# Altium PCB USBc to Ethernet(2.0).PcbDoc (part 1 of 3)
Units mil, origin at the board's own origin, x right, y up, seen from the top; angles counter-clockwise.
Board outline 2450 x 1100 mil, 4 copper layers (L1, L2, L3, L4), stack 61.58 mil thick; 85 components, 67 nets, 300 pads, 234 vias.
Unrouted connection lines stored in the file: 3.
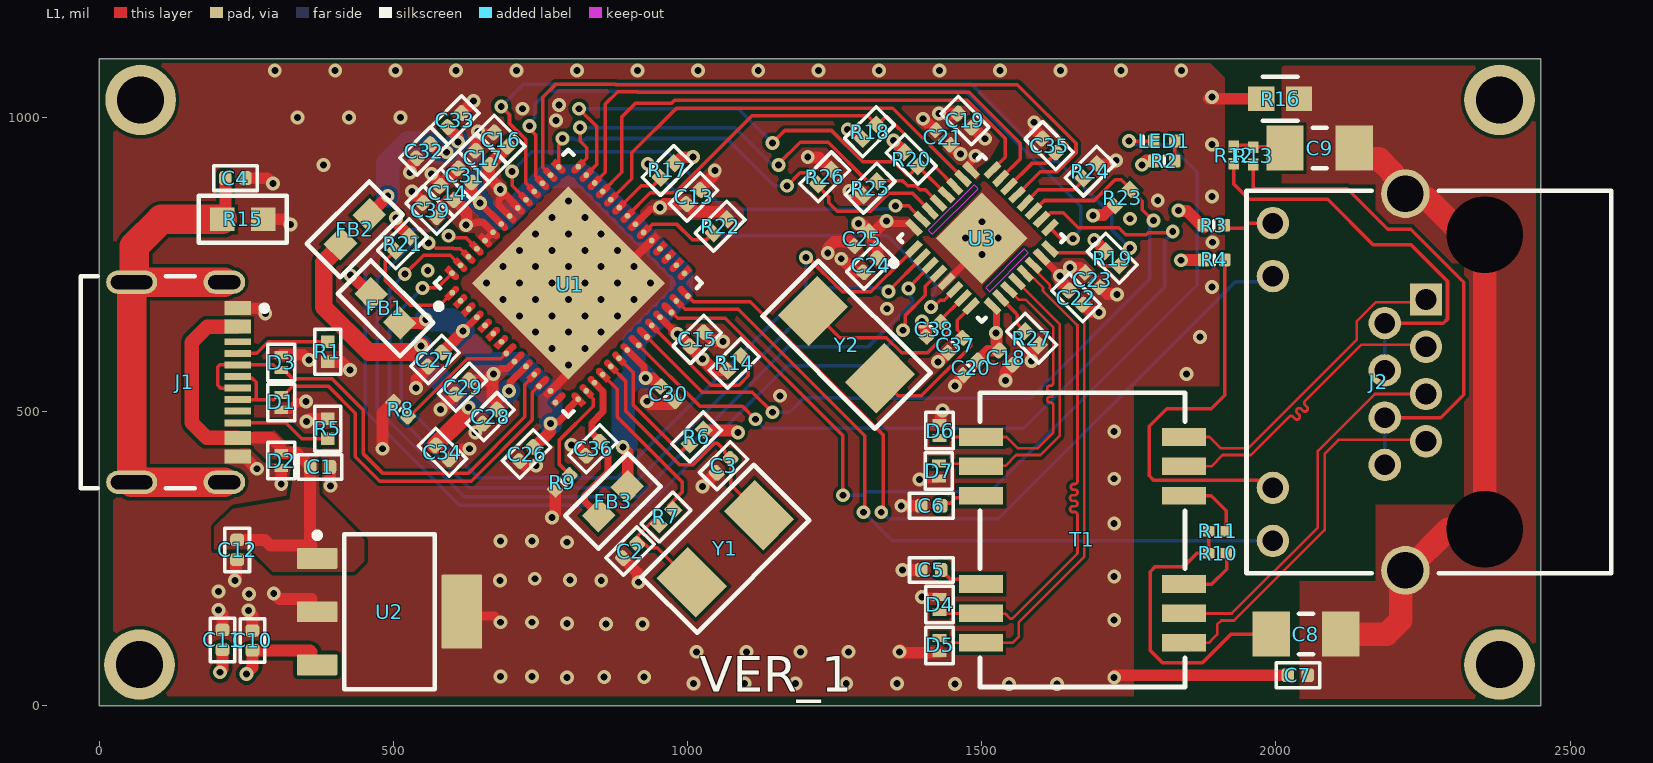
[diagram p0: L1 view]
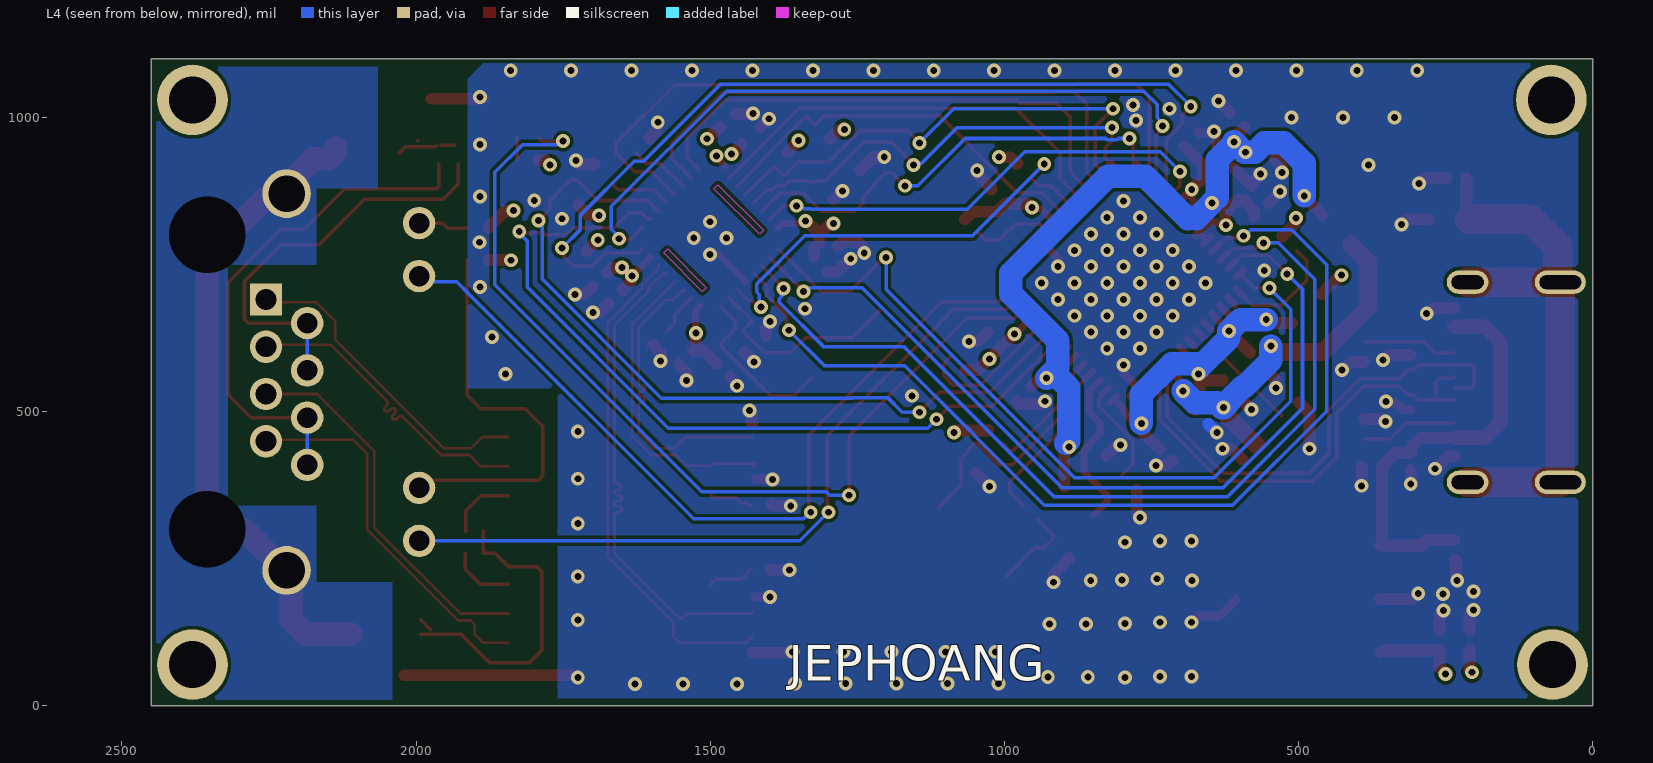
[diagram p1: L4 view, seen from below]
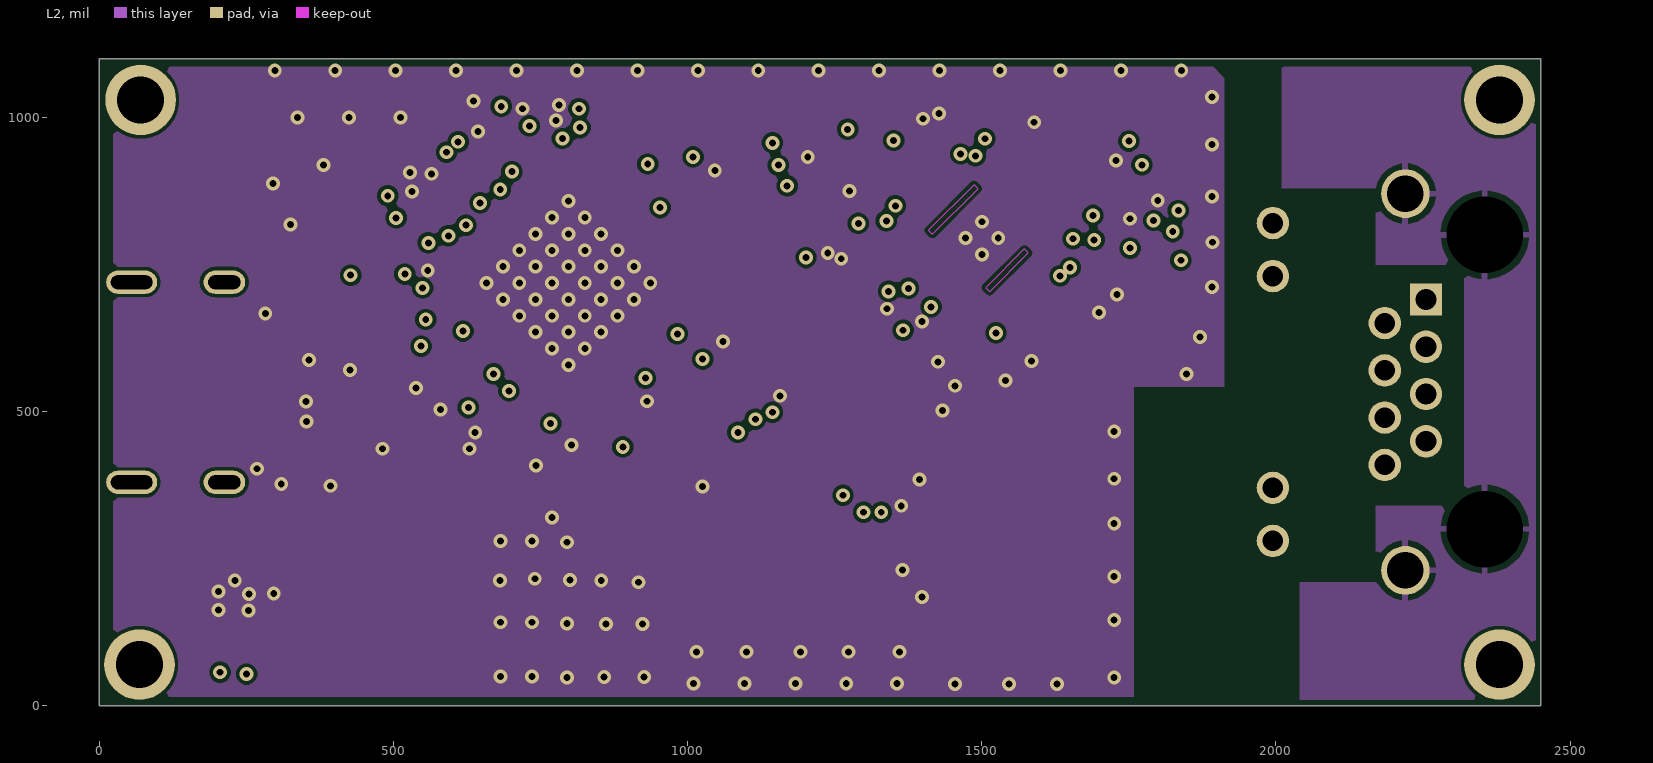
[diagram p2: L2]
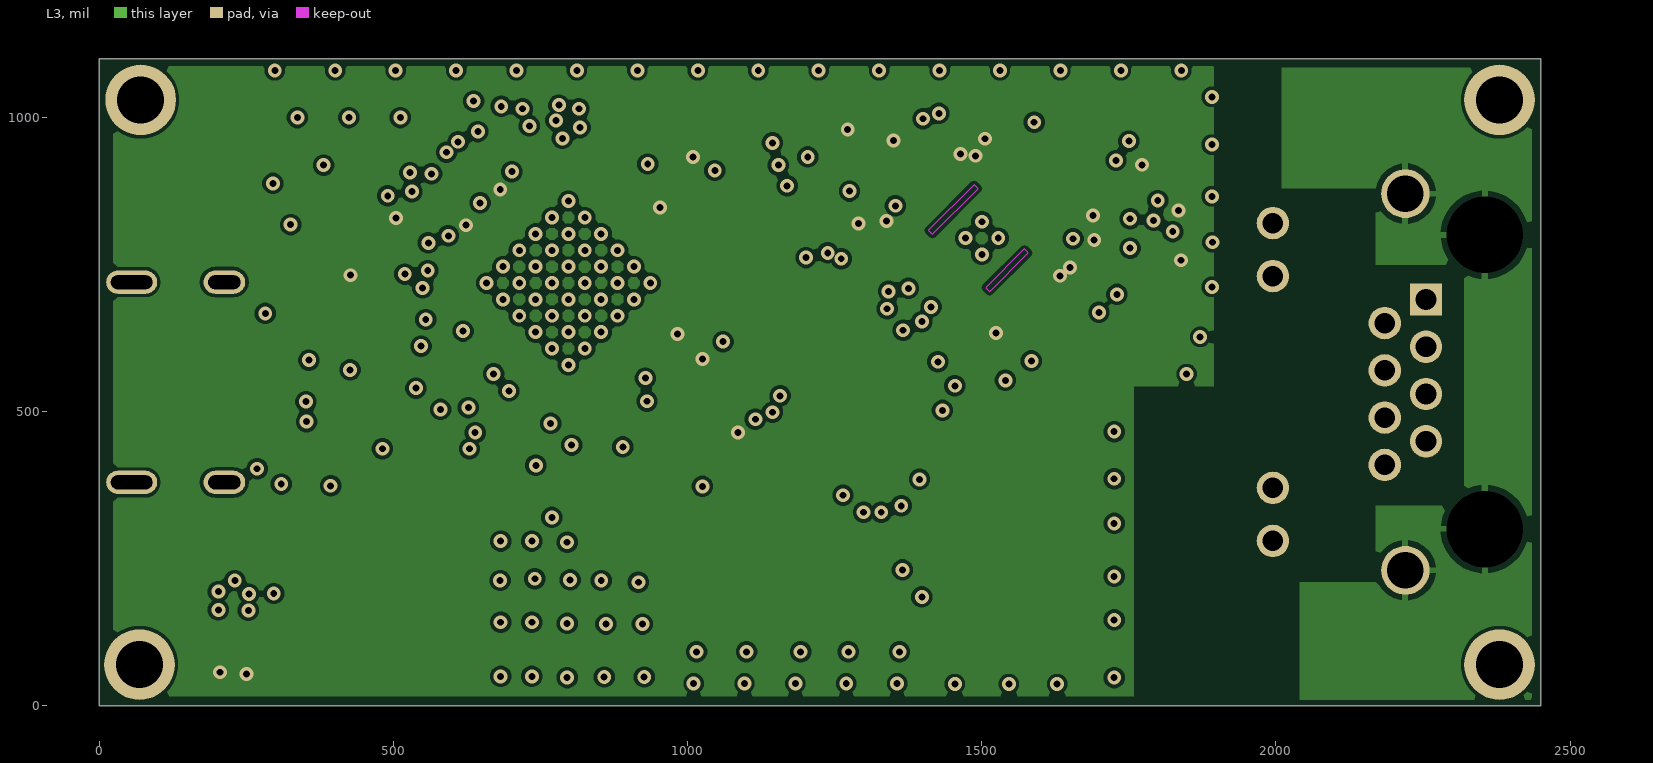
[diagram p3: L3]
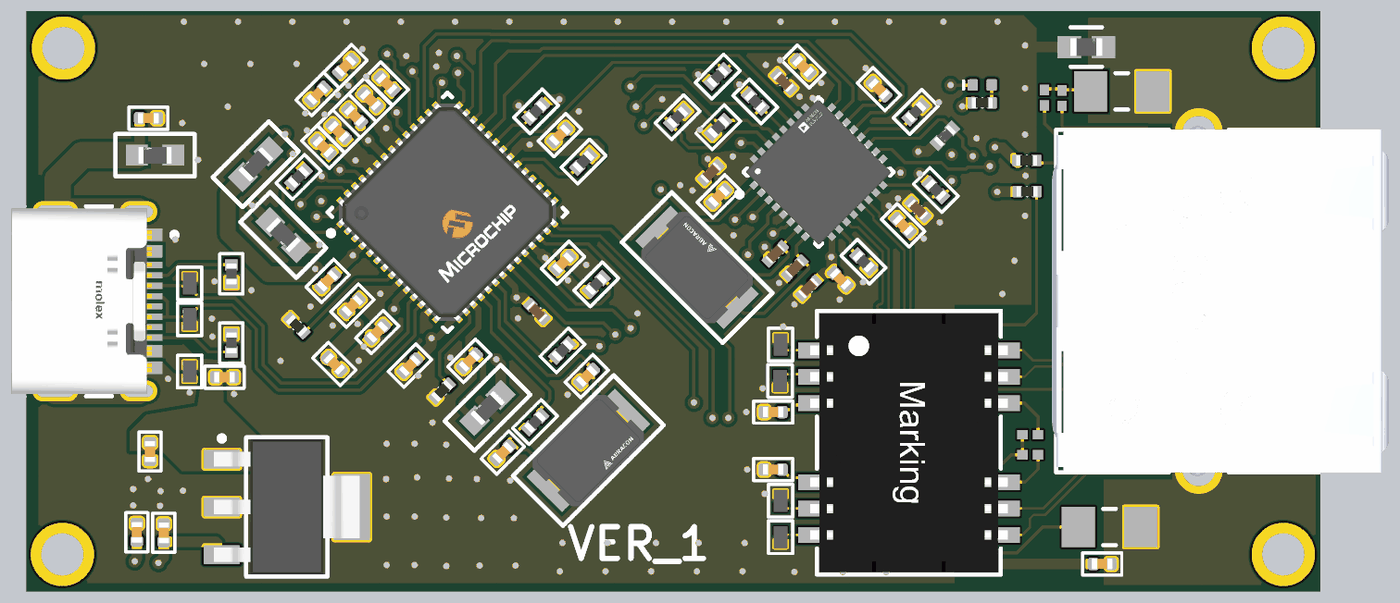
[diagram p5: 3D render of the assembled board from above, using the file's embedded part models]

## Layer stack, top to bottom
Top Solder: solder mask 0.4, Solder Resist, Dk 3.5
L1: signal copper 1.378
Dielectric 2: prepreg 3.913, PP-006, Dk 4.1
L2: signal copper 0.598
Dielectric5: dielectric 49.803, FR-4, Dk 4.8
L3: signal copper 0.598
Dielectric 3: prepreg 3.91, PP-006, Dk 4.1
L4: signal copper 1.38
Bottom Solder: solder mask 0.4, Solder Resist, Dk 3.5

## Board outline
0,0 2450,0 2450,1100 0,1100

## Design rules (kind name [scope] priority, off if disabled: settings)
Clearance Small [Keepout vs IsPad] p1: gap=0 ignorepadtopadclearanceinfootprint=FALSE
Clearance DIFF [InDifferentialPairClass('DIFF90') or InDifferentialPairClass('DIFF100')] p2: gap=6 ignorepadtopadclearanceinfootprint=FALSE
Clearance Clearance_1 [All] p3: gap=6 ignorepadtopadclearanceinfootprint=FALSE except(4: SMDPad-SMDPad)
DiffPairsRouting DIFF100 [InDifferentialPairClass('DIFF100')] p1: maxlimit=7 minlimit=7 mostfreqgap=7 toplayer_minwidth=4.5 toplayer_maxwidth=4.5 toplayer_prefwidth=4.5 midlayer1_minwidth=4.5 midlayer1_maxwidth=4.5 midlayer1_prefwidth=4.5 midlayer2_minwidth=4.5 midlayer2_maxwidth=4.5 midlayer2_prefwidth=4.5 bottomlayer_minwidth=4.5 bottomlayer_maxwidth=4.5 bottomlayer_prefwidth=4.5 maxuncoupledlength=500
DiffPairsRouting DIFF90_2 [InDifferentialPairClass('DIFF90')] p2: maxlimit=8 minlimit=7 mostfreqgap=8 toplayer_prefgap=7 toplayer_minwidth=6 toplayer_maxwidth=6 toplayer_prefwidth=6 midlayer1_prefgap=7 midlayer1_minwidth=6 midlayer1_maxwidth=6 midlayer1_prefwidth=6 midlayer2_prefgap=7 midlayer2_minwidth=6 midlayer2_maxwidth=6 midlayer2_prefwidth=6 bottomlayer_minwidth=6 bottomlayer_maxwidth=6 bottomlayer_prefwidth=6 maxuncoupledlength=500
HoleSize [All] p1: absolutevalues=TRUE maxlimit=1000 minlimit=1 maxpercent=80.000 minpercent=20.000
MatchedLengths MDI [InDifferentialPair('MDI_0') or InDifferentialPair('MDI_1')] p1: tolerance=10 checknetsindiffpair=TRUE checkdiffpairvsdiffpair=FALSE checkxsignals=FALSE checkothers=FALSE
MatchedLengths TD_RD [InDifferentialPair('RD') or InDifferentialPair('TD')] p2: tolerance=5 checknetsindiffpair=TRUE checkdiffpairvsdiffpair=FALSE checkxsignals=FALSE checkothers=FALSE
MinimumSolderMaskSliver [All] p1: minsoldermaskwidth=1.5
PlaneConnect [All] p1: pad.planeconnectstyle=Relief pad.reliefexpansion=20 pad.reliefentries=4 pad.reliefconductorwidth=10 pad.reliefairgap=10 via.planeconnectstyle=Direct via.reliefexpansion=20 via.reliefentries=4 via.reliefconductorwidth=10 via.reliefairgap=10
PolygonConnect [OnTop or OnBottom] p1: connectstyle=Direct reliefconductorwidth=10 reliefentries=4 polygonreliefangle="90 Angle" airgapwidth=10
PolygonConnect PolygonConnect_1 [All] p2: thpad.connectstyle=Relief thpad.reliefconductorwidth=10 thpad.reliefentries=4 thpad.polygonreliefangle="90 Angle" thpad.airgapwidth=10 smdpad.connectstyle=Direct smdpad.reliefconductorwidth=10 smdpad.reliefentries=4 smdpad.polygonreliefangle="90 Angle" smdpad.airgapwidth=10 via.connectstyle=Direct via.reliefconductorwidth=10 via.reliefentries=4 via.polygonreliefangle="90 Angle" via.airgapwidth=10
RoutingVias [All] p1: holewidth=11.81 width=23.62 viastyle="Through Hole" minholewidth=11.81 minwidth=23.62 maxholewidth=11.81 maxwidth=23.62
ShortCircuit [WithinRoom('Small')] p1: allowed=TRUE
SilkToSolderMaskClearance [IsPad] p1: minsilkscreentomaskgap=4 clearancetoexposedcopper=TRUE
SolderMaskExpansion [All] p1: expansion=4 istentingtop=FALSE
SupplyNets "Schematic Supply Nets" [InNet('GND_USB')] p1: voltage=0.000
SupplyNets "Schematic Supply Nets_9" [InNet('+3.3V')] p2: voltage=0.000
SupplyNets "Schematic Supply Nets_7" [InNet('+3.3V VDD')] p3: voltage=0.000
SupplyNets "Schematic Supply Nets_6" [InNet('VDDCORE')] p4: voltage=0.000
SupplyNets "Schematic Supply Nets_5" [InNet('VDDPLL')] p5: voltage=0.000
SupplyNets "Schematic Supply Nets_4" [InNet('VDDUSBPLL')] p6: voltage=0.000
SupplyNets "Schematic Supply Nets_3" [InNet('+5V')] p7: voltage=0.000
SupplyNets "Schematic Supply Nets_2" [InNet('GND_CLASSIS')] p8: voltage=0.000
SupplyNets "Schematic Supply Nets_1" [InNet('GND')] p9: voltage=0.000
Width [All] p1: maxlimit=100 minlimit=6 preferedwidth=10 toplayer_prefwidth=6 midlayer1_minwidth=8 midlayer2_minwidth=8 bottomlayer_prefwidth=6 minimp=50.000000 maximp=50.000000 favimp=50.000000
24 further rules are at their usual default settings.

## Classes and differential pairs
component class "Room Definition1": U3
differential pair class DIFF100: MDI_0 MDI_1 RD TD
differential pair class DIFF90: USB
differential pair USB: +USB_P -USB_N
differential pair TD: +TD_P -TD_N
differential pair RD: +RD_P -RD_N
differential pair MDI_1: +MDI_1_P -MDI_1_N
differential pair MDI_0: +MDI_0_P -MDI_0_N

## Components (designator, comment, footprint, x,y, rotation, side; value= is the part's Value field where it differs from the comment)
C1 "100nF, 50V" CAP_0402 375,406 r180 top
C2 "15pF" CAP_0402 902.03,263.03 r45 top
C3 "15pF" CAP_0402 1061,408 r45 top
C4 "4700pF" CAP_0402 231,897 r180 top
C5 "100nF, 50V" CAP_0402 1414,231 r0 top
C6 "100nF, 50V" CAP_0402 1414,340 r0 top
C7 "4700pF" CAP_0402 2037.07,52 r180 top
C8 "1000pF 2KV" JD-202R18W102KV4E-2_M 2051,122 r180 top
C9 "1000pF 2KV" JD-202R18W102KV4E-2_M 2074,948 r180 top
C10 "10uF, 10V" CAP_0402 260,111.07 r270 top
C11 "10uF, 10V" CAP_0402 209,112 r270 top
C12 "4.7uF, 16V" CAP_0402 234,265.07 r90 top
C13 "100nF, 50V" CAP_0402 1010,865 r225 top
C14 "100nF, 50V" CAP_0402 591.19,871.81 r315 top
C15 "100nF, 50V" CAP_0402 1016,623 r225 top
C16 "4700pF" CAP_0402 682.32,962.68 r315 top
C17 "1500pF" CAP_0402 651.32,931.68 r315 top
C18 "100nF, 50V" CAP_0402 1541,592 r135 top
C19 "100nF, 50V" CAP_0402 1471,995 r315 top
C20 "Capacitor 10nF +/-20% 50V 0402" CAPC0402(1005)60_L 1481,575 r45 top value=10nF
C21 "Capacitor 10nF +/-20% 50V 0402" CAPC0402(1005)60_L 1433.9,966.16 r315 top value=10nF
C22 "100nF, 50V" CAP_0402 1660,694 r135 top
C23 "Capacitor 10nF +/-20% 50V 0402" CAPC0402(1005)60_L 1688,724 r135 top value=10nF
C24 "100nF, 50V" CAP_0402 1311,749 r45 top
C25 "Capacitor 10nF +/-20% 50V 0402" CAPC0402(1005)60_L 1296,794 r45 top value=10nF
C26 "100nF, 50V" CAP_0402 726,428 r45 top
C27 "4700pF" CAP_0402 570.32,588.68 r45 top
C28 "1500pF" CAP_0402 664.32,491.68 r45 top
C29 "100nF, 50V" CAP_0402 617.16,541.68 r45 top
C30 "Capacitor 1µF +/-20% 10V 0402" CAPC0402(1005)60_L 966.63,530.21 r135 top value=1µF
C31 "100nF, 50V" CAP_0402 621.32,901.68 r315 top
C32 "4700pF" CAP_0402 551.19,942.87 r45 top
C33 "1500pF" CAP_0402 604.13,995.81 r225 top
C34 "4700pF" CAP_0402 583,431 r135 top
C35 "100nF, 50V" CAP_0402 1614.42,952.19 r315 top
C36 "4700pF" CAP_0402 839,437 r45 top
C37 "Capacitor 12pF +/-10% 50V 0402" CAPC0402(1005)33_L 1455,613 r225 top value=12pF
C38 "Capacitor 12pF +/-10% 50V 0402" CAPC0402(1005)33_L 1418,640 r225 top value=12pF
C39 "4700pF" CAP_0402 562.19,842.81 r315 top
D1 "" DIODE_0402 309,515.8 r90 top
D2 "AQ3045-01ETG" DIODE_0402 309,416.8 r90 top
D3 "" DIODE_0402 309,583.8 r270 top
D4 "" DIODE_0402 1428,172 r270 top
D5 "" DIODE_0402 1428,102.8 r90 top
D6 "AQ3045-01ETG" DIODE_0402 1428,467.8 r270 top
D7 "" DIODE_0402 1427,399 r90 top
FB1 "120" RES_0603 486.16,675.68 r315 top
FB2 "120" RES_0603 434,810 r225 top
FB3 "120" RES_0603 873,348 r225 top
J1 "USB-C" USBc_16PIN_QFN__footprint 100,550 r270 top
J2 "RJHSE-5381" AMPH-RJHSE-5381_V 2219.96,550.47 r90 top
LED1 "QBLP595-IB" QTB-QBLP595_V 1809.91,960 r0 top
R1 "5.1K" RES_0402 388,602.01 r270 top
R2 "Resistor 330R +/-5 % 0402 63 mW" RESC0402(1005)_L 1810.11,926.19 r180 top value=330
R3 "Resistor 330R +/-5 % 0402 63 mW" RESC0402(1005)_L 1894.28,817 r180 top value=330
R4 "Resistor 330R +/-5 % 0402 63 mW" RESC0402(1005)_L 1895,758 r180 top value=330
R5 "5.1K" RES_0402 388,471 r90 top
R6 "0R" RES_0402 1015,457 r225 top
R7 "500" RES_0402 963,321 r45 top
R8 "12KR2F" RESC0402(1005)_L 512,503.83 r135 top value=12k
R9 "12KR2F" RESC0402(1005)_L 787,380 r225 top value=12k
R10 "75" RESC1005X40X25LL05T10 1900.76,259 r0 top
R11 "75" RESC1005X40X25LL05T10 1900.76,297 r0 top
R12 "75" RESC1005X40X25LL05T10 1928,936 r270 top
R13 "75" RESC1005X40X25LL05T10 1961,935 r270 top
R14 "10K" RES_0402 1079,582 r225 top
R15 "10M" RES_0603 243.48,827 r180 top
R16 "10M" FP-CRCW0603-e3-IPC_A 2007,1032 r0 top
R17 "1K" RES_0402 965,910 r45 top value=1kR
R18 "10K" RES_0402 1309,976 r225 top
R19 "10K" RES_0402 1722,761 r135 top
R20 "10K" RES_0402 1380,929 r135 top
R21 "10K" RES_0402 515.13,785.65 r45 top
R22 "10K" RES_0402 1055,815 r45 top
R23 "1.5k" FP-RT0402-MFG 1739,864 r45 top value=1.5KΩ
R24 "10K" RES_0402 1684,909 r225 top
R25 "10K" RES_0402 1310,880 r45 top
R26 "10K" RES_0402 1233,899 r225 top
R27 "3.01K" RES_0402 1585,625 r315 top
T1 "749020100A" 749020100A 1671,282 r270 top
U1 "LAN9500AI-ABZJ-TR" FP-56QFN-5904-8x8B-MFG 797.16,718.68 r45 top
U2 "TL1963A-33DCYR" Regulator_4PIN 492.97,160 r0 top
U3 "ADIN1200CCP32Z" FP-CP-32-31-MFG 1500,795 r45 top
Y1 "25MHZ" Crystal_25MHZ 1064,267 r45 top
Y2 "25MHZ" Crystal_25MHZ 1270,614 r135 top

## Footprints (in the part's own frame and the unit in brackets; to place one, negate y for a bottom-side part, rotate by r counter-clockwise, add the part's x,y. Pads: shape width x height; smd on the part's side, far side on the other; paste and mask are expansions set on the pad)
749020100A [mm] "SMD LAN Transformers, body 12.4x8.6mm, 12-Leads"
  rect 0.76x1.9 smd: 1(-4.445,-4.385) 2(-3.175,-4.385) 3(-1.905,-4.385) 6(1.905,-4.385) 7(3.175,-4.385) 8(4.445,-4.385) 9(4.445,4.385) 10(3.175,4.385) 11(1.905,4.385) 14(-1.905,4.385) 15(-3.175,4.385) 16(-4.445,4.385)
  silkscreen extent -6.35,-4.43 6.35,4.43, body extent -6.22,-4.75 6.23,4.75, height 2.93
AMPH-RJHSE-5381_V [mm] "THD, 12-Leads, Body 16.51x15.75mm"
  rect 1.4x1.4 hole 0.89 mask+0.102: 1(3.56,-0.89)
  round 1.4 hole 0.89 mask+0.102: 2(2.54,0.89) 3(1.52,-0.89) 4(0.5,0.89) 5(-0.52,-0.89) 6(-1.54,0.89) 7(-2.56,-0.89) 8(-3.58,0.89) 9(-6.86,5.72) 10(-4.57,5.72) 11(4.57,5.72) 12(6.86,5.72)
  round 0 hole 3.3 unplated mask+0.102: MH1(-6.35,-3.43) MH2(6.35,-3.43)
  round 2.1 hole 1.57: S1(-8.13,0) S2(8.13,0)
  silkscreen extent -8.25,-8.89 8.25,6.86, body extent -8.42,-9.14 8.42,7.06, height 14.89
CAP_0402 [mm]
  rrect53% 0.54x0.6 smd: 1(-0.43,0) 2(0.43,0)
  silkscreen extent -0.94,-0.53 0.94,0.53, body extent -0.5,-0.25 0.5,0.25, height 0.55
CAPC0402(1005)33_L [mm] "Chip Capacitor, Body 1.0x0.5mm, Height 0.33mm, IPC High Density"
  rrect25% 0.5x0.55 smd: 1(-0.45,0) 2(0.45,0)
  silkscreen extent 0,-0.2 0,0.2, body extent -0.5,-0.25 0.5,0.25, height 0.55
CAPC0402(1005)60_L [mm] "Chip Capacitor, Body 1.0x0.5mm, Height 0.6mm, IPC High Density"
  rrect25% 0.5x0.55 smd: 1(-0.45,0) 2(0.45,0)
  silkscreen extent 0,-0.2 0,0.2, body extent -0.5,-0.25 0.5,0.25, height 0.6
Crystal_25MHZ [mm]
  rect 1.9x2.4 smd paste+0 mask+0: 1(-2.05,0) 2(2.05,0)
  silkscreen extent -3.43,-1.7 3.43,1.7, body extent -3.1,-1.8 3.1,1.8, height 0.25
DIODE_0402 [mm]
  rect 0.35x0.6 smd: 1(-0.325,0) 2(0.325,0)
  silkscreen extent -0.79,-0.58 0.79,0.58, body extent -0.54,-0.34 0.54,0.34, height 0.44
FP-56QFN-5904-8x8B-MFG [mm]
  round 0.252 smd paste-1000 mask+0: 1(-3.84,3.25) 2(-3.84,2.75) 3(-3.84,2.25) 4(-3.84,1.75) 5(-3.84,1.25) 6(-3.84,0.75) 7(-3.84,0.25) 8(-4.045,-0.25) 9(-4.045,-0.75) 10(-3.84,-1.25) 11(-3.84,-1.75) 12(-4.045,-2.25) 13(-3.84,-2.75) 14(-4.045,-3.25) 15(-3.25,-3.84) 16(-2.75,-3.84) 17(-2.25,-3.84) 18(-1.75,-3.84) 19(-1.25,-3.84) 20(-0.75,-3.84) 21(-0.25,-3.84) 22(0.25,-4.045) 23(0.75,-4.045) 24(1.25,-3.84) 25(1.75,-3.84) 26(2.25,-4.045) 27(2.75,-3.84) 28(3.25,-4.045) 29(3.84,-3.25) 30(3.84,-2.75) 31(3.84,-2.25) 32(3.84,-1.75) 33(3.84,-1.25) 34(3.84,-0.75) 35(3.84,-0.25) 36(3.854,0.25) 37(3.854,0.75) 38(3.84,1.25) 39(3.84,1.75) 40(3.854,2.25) 41(3.84,2.75) 42(3.854,3.25) 43(3.25,3.84) 44(2.75,3.84) 45(2.25,3.84) 46(1.75,3.84) 47(1.25,3.84) 48(0.75,3.84) 49(0.25,3.84) 50(-0.25,3.854) 51(-0.75,3.854) 52(-1.25,3.84) 53(-1.75,3.84) 54(-2.25,3.854) 55(-2.75,3.84) 56(-3.25,3.854)
  rect 5.9x5.9 smd paste-1000 mask+0: 57(0,0)
  L1 region: -4.185,-2.61 -3.635,-2.61 -3.581,-2.621 -3.536,-2.651 -3.506,-2.696 -3.495,-2.75 -3.495,-2.75 -3.506,-2.804 -3.536,-2.849 -3.581,-2.879 -3.635,-2.89 -3.635,-2.89 -4.185,-2.89
  L1 region: 4.185,-1.39 3.635,-1.39 3.581,-1.379 3.536,-1.349 3.506,-1.304 3.495,-1.25 3.495,-1.25 3.506,-1.196 3.536,-1.151 3.581,-1.121 3.635,-1.11 3.635,-1.11 4.185,-1.11
  L1 region: 0.89,4.185 0.89,3.635 0.879,3.581 0.849,3.536 0.804,3.506 0.75,3.495 0.75,3.495 0.696,3.506 0.651,3.536 0.621,3.581 0.61,3.635 0.61,3.635 0.61,4.185
  L1 region: 0.39,4.185 0.39,3.635 0.379,3.581 0.349,3.536 0.304,3.506 0.25,3.495 0.25,3.495 0.196,3.506 0.151,3.536 0.121,3.581 0.11,3.635 0.11,3.635 0.11,4.185
  L1 region: 1.61,-4.185 1.61,-3.635 1.621,-3.581 1.651,-3.536 1.696,-3.506 1.75,-3.495 1.75,-3.495 1.804,-3.506 1.849,-3.536 1.879,-3.581 1.89,-3.635 1.89,-3.635 1.89,-4.185
  L1 region: 4.185,-0.39 3.635,-0.39 3.581,-0.379 3.536,-0.349 3.506,-0.304 3.495,-0.25 3.495,-0.25 3.506,-0.196 3.536,-0.151 3.581,-0.121 3.635,-0.11 3.635,-0.11 4.185,-0.11
  L1 region: -0.61,4.185 -0.61,3.635 -0.621,3.581 -0.651,3.536 -0.696,3.506 -0.75,3.495 -0.75,3.495 -0.804,3.506 -0.849,3.536 -0.879,3.581 -0.89,3.635 -0.89,3.635 -0.89,4.185
  L1 region: -1.11,4.185 -1.11,3.635 -1.121,3.581 -1.151,3.536 -1.196,3.506 -1.25,3.495 -1.25,3.495 -1.304,3.506 -1.349,3.536 -1.379,3.581 -1.39,3.635 -1.39,3.635 -1.39,4.185
  L1 region: 0.61,-4.185 0.61,-3.635 0.621,-3.581 0.651,-3.536 0.696,-3.506 0.75,-3.495 0.75,-3.495 0.804,-3.506 0.849,-3.536 0.879,-3.581 0.89,-3.635 0.89,-3.635 0.89,-4.185
  L1 region: 2.89,4.185 2.89,3.635 2.879,3.581 2.849,3.536 2.804,3.506 2.75,3.495 2.75,3.495 2.696,3.506 2.651,3.536 2.621,3.581 2.61,3.635 2.61,3.635 2.61,4.185
  L1 region: 4.185,0.61 3.635,0.61 3.581,0.621 3.536,0.651 3.506,0.696 3.495,0.75 3.495,0.75 3.506,0.804 3.536,0.849 3.581,0.879 3.635,0.89 3.635,0.89 4.185,0.89
  L1 region: -2.11,4.185 -2.11,3.635 -2.121,3.581 -2.151,3.536 -2.196,3.506 -2.25,3.495 -2.25,3.495 -2.304,3.506 -2.349,3.536 -2.379,3.581 -2.39,3.635 -2.39,3.635 -2.39,4.185
  L1 region: -4.185,-0.11 -3.635,-0.11 -3.581,-0.121 -3.536,-0.151 -3.506,-0.196 -3.495,-0.25 -3.495,-0.25 -3.506,-0.304 -3.536,-0.349 -3.581,-0.379 -3.635,-0.39 -3.635,-0.39 -4.185,-0.39
  L1 region: 4.185,2.61 3.635,2.61 3.581,2.621 3.536,2.651 3.506,2.696 3.495,2.75 3.495,2.75 3.506,2.804 3.536,2.849 3.581,2.879 3.635,2.89 3.635,2.89 4.185,2.89
  L1 region: 1.39,4.185 1.39,3.635 1.379,3.581 1.349,3.536 1.304,3.506 1.25,3.495 1.25,3.495 1.196,3.506 1.151,3.536 1.121,3.581 1.11,3.635 1.11,3.635 1.11,4.185
  L1 region: 4.185,1.61 3.635,1.61 3.581,1.621 3.536,1.651 3.506,1.696 3.495,1.75 3.495,1.75 3.506,1.804 3.536,1.849 3.581,1.879 3.635,1.89 3.635,1.89 4.185,1.89
  L1 region: -4.185,3.39 -3.635,3.39 -3.581,3.379 -3.536,3.349 -3.506,3.304 -3.495,3.25 -3.495,3.25 -3.506,3.196 -3.536,3.151 -3.581,3.121 -3.635,3.11 -3.635,3.11 -4.185,3.11
  L1 region: -4.185,-1.11 -3.635,-1.11 -3.581,-1.121 -3.536,-1.151 -3.506,-1.196 -3.495,-1.25 -3.495,-1.25 -3.506,-1.304 -3.536,-1.349 -3.581,-1.379 -3.635,-1.39 -3.635,-1.39 -4.185,-1.39
  L1 region: 1.11,-4.185 1.11,-3.635 1.121,-3.581 1.151,-3.536 1.196,-3.506 1.25,-3.495 1.25,-3.495 1.304,-3.506 1.349,-3.536 1.379,-3.581 1.39,-3.635 1.39,-3.635 1.39,-4.185
  L1 region: 1.89,4.185 1.89,3.635 1.879,3.581 1.849,3.536 1.804,3.506 1.75,3.495 1.75,3.495 1.696,3.506 1.651,3.536 1.621,3.581 1.61,3.635 1.61,3.635 1.61,4.185
  L1 region: -4.185,-2.11 -3.635,-2.11 -3.581,-2.121 -3.536,-2.151 -3.506,-2.196 -3.495,-2.25 -3.495,-2.25 -3.506,-2.304 -3.536,-2.349 -3.581,-2.379 -3.635,-2.39 -3.635,-2.39 -4.185,-2.39
  L1 region: 4.185,-0.89 3.635,-0.89 3.581,-0.879 3.536,-0.849 3.506,-0.804 3.495,-0.75 3.495,-0.75 3.506,-0.696 3.536,-0.651 3.581,-0.621 3.635,-0.61 3.635,-0.61 4.185,-0.61
  L1 region: 3.11,-4.185 3.11,-3.635 3.121,-3.581 3.151,-3.536 3.196,-3.506 3.25,-3.495 3.25,-3.495 3.304,-3.506 3.349,-3.536 3.379,-3.581 3.39,-3.635 3.39,-3.635 3.39,-4.185
  L1 region: -1.61,4.185 -1.61,3.635 -1.621,3.581 -1.651,3.536 -1.696,3.506 -1.75,3.495 -1.75,3.495 -1.804,3.506 -1.849,3.536 -1.879,3.581 -1.89,3.635 -1.89,3.635 -1.89,4.185
  L1 region: 4.185,2.11 3.635,2.11 3.581,2.121 3.536,2.151 3.506,2.196 3.495,2.25 3.495,2.25 3.506,2.304 3.536,2.349 3.581,2.379 3.635,2.39 3.635,2.39 4.185,2.39
  L1 region: -2.89,-4.185 -2.89,-3.635 -2.879,-3.581 -2.849,-3.536 -2.804,-3.506 -2.75,-3.495 -2.75,-3.495 -2.696,-3.506 -2.651,-3.536 -2.621,-3.581 -2.61,-3.635 -2.61,-3.635 -2.61,-4.185
  L1 region: 2.39,4.185 2.39,3.635 2.379,3.581 2.349,3.536 2.304,3.506 2.25,3.495 2.25,3.495 2.196,3.506 2.151,3.536 2.121,3.581 2.11,3.635 2.11,3.635 2.11,4.185
  L1 region: 4.185,0.11 3.635,0.11 3.581,0.121 3.536,0.151 3.506,0.196 3.495,0.25 3.495,0.25 3.506,0.304 3.536,0.349 3.581,0.379 3.635,0.39 3.635,0.39 4.185,0.39
  L1 region: -3.11,4.185 -3.11,3.635 -3.121,3.581 -3.151,3.536 -3.196,3.506 -3.25,3.495 -3.25,3.495 -3.304,3.506 -3.349,3.536 -3.379,3.581 -3.39,3.635 -3.39,3.635 -3.39,4.185
  L1 region: -0.89,-4.185 -0.89,-3.635 -0.879,-3.581 -0.849,-3.536 -0.804,-3.506 -0.75,-3.495 -0.75,-3.495 -0.696,-3.506 -0.651,-3.536 -0.621,-3.581 -0.61,-3.635 -0.61,-3.635 -0.61,-4.185
  L1 region: -0.11,4.185 -0.11,3.635 -0.121,3.581 -0.151,3.536 -0.196,3.506 -0.25,3.495 -0.25,3.495 -0.304,3.506 -0.349,3.536 -0.379,3.581 -0.39,3.635 -0.39,3.635 -0.39,4.185
  L1 region: -0.39,-4.185 -0.39,-3.635 -0.379,-3.581 -0.349,-3.536 -0.304,-3.506 -0.25,-3.495 -0.25,-3.495 -0.196,-3.506 -0.151,-3.536 -0.121,-3.581 -0.11,-3.635 -0.11,-3.635 -0.11,-4.185
  L1 region: 3.39,4.185 3.39,3.635 3.379,3.581 3.349,3.536 3.304,3.506 3.25,3.495 3.25,3.495 3.196,3.506 3.151,3.536 3.121,3.581 3.11,3.635 3.11,3.635 3.11,4.185
  L1 region: 4.185,3.11 3.635,3.11 3.581,3.121 3.536,3.151 3.506,3.196 3.495,3.25 3.495,3.25 3.506,3.304 3.536,3.349 3.581,3.379 3.635,3.39 3.635,3.39 4.185,3.39
  L1 region: -1.39,-4.185 -1.39,-3.635 -1.379,-3.581 -1.349,-3.536 -1.304,-3.506 -1.25,-3.495 -1.25,-3.495 -1.196,-3.506 -1.151,-3.536 -1.121,-3.581 -1.11,-3.635 -1.11,-3.635 -1.11,-4.185
  L1 region: -2.61,4.185 -2.61,3.635 -2.621,3.581 -2.651,3.536 -2.696,3.506 -2.75,3.495 -2.75,3.495 -2.804,3.506 -2.849,3.536 -2.879,3.581 -2.89,3.635 -2.89,3.635 -2.89,4.185
  L1 region: 4.185,1.11 3.635,1.11 3.581,1.121 3.536,1.151 3.506,1.196 3.495,1.25 3.495,1.25 3.506,1.304 3.536,1.349 3.581,1.379 3.635,1.39 3.635,1.39 4.185,1.39
  L1 region: -3.39,-4.185 -3.39,-3.635 -3.379,-3.581 -3.349,-3.536 -3.304,-3.506 -3.25,-3.495 -3.25,-3.495 -3.196,-3.506 -3.151,-3.536 -3.121,-3.581 -3.11,-3.635 -3.11,-3.635 -3.11,-4.185
  L1 region: -4.185,-0.61 -3.635,-0.61 -3.581,-0.621 -3.536,-0.651 -3.506,-0.696 -3.495,-0.75 -3.495,-0.75 -3.506,-0.804 -3.536,-0.849 -3.581,-0.879 -3.635,-0.89 -3.635,-0.89 -4.185,-0.89
  L1 region: -4.185,1.89 -3.635,1.89 -3.581,1.879 -3.536,1.849 -3.506,1.804 -3.495,1.75 -3.495,1.75 -3.506,1.696 -3.536,1.651 -3.581,1.621 -3.635,1.61 -3.635,1.61 -4.185,1.61
  L1 region: -1.89,-4.185 -1.89,-3.635 -1.879,-3.581 -1.849,-3.536 -1.804,-3.506 -1.75,-3.495 -1.75,-3.495 -1.696,-3.506 -1.651,-3.536 -1.621,-3.581 -1.61,-3.635 -1.61,-3.635 -1.61,-4.185
  L1 region: 0.11,-4.185 0.11,-3.635 0.121,-3.581 0.151,-3.536 0.196,-3.506 0.25,-3.495 0.25,-3.495 0.304,-3.506 0.349,-3.536 0.379,-3.581 0.39,-3.635 0.39,-3.635 0.39,-4.185
  L1 region: 2.11,-4.185 2.11,-3.635 2.121,-3.581 2.151,-3.536 2.196,-3.506 2.25,-3.495 2.25,-3.495 2.304,-3.506 2.349,-3.536 2.379,-3.581 2.39,-3.635 2.39,-3.635 2.39,-4.185
  L1 region: -4.185,-1.61 -3.635,-1.61 -3.581,-1.621 -3.536,-1.651 -3.506,-1.696 -3.495,-1.75 -3.495,-1.75 -3.506,-1.804 -3.536,-1.849 -3.581,-1.879 -3.635,-1.89 -3.635,-1.89 -4.185,-1.89
  L1 region: -2.39,-4.185 -2.39,-3.635 -2.379,-3.581 -2.349,-3.536 -2.304,-3.506 -2.25,-3.495 -2.25,-3.495 -2.196,-3.506 -2.151,-3.536 -2.121,-3.581 -2.11,-3.635 -2.11,-3.635 -2.11,-4.185
  L1 region: 2.61,-4.185 2.61,-3.635 2.621,-3.581 2.651,-3.536 2.696,-3.506 2.75,-3.495 2.75,-3.495 2.804,-3.506 2.849,-3.536 2.879,-3.581 2.89,-3.635 2.89,-3.635 2.89,-4.185
  L1 region: -4.185,2.89 -3.635,2.89 -3.581,2.879 -3.536,2.849 -3.506,2.804 -3.495,2.75 -3.495,2.75 -3.506,2.696 -3.536,2.651 -3.581,2.621 -3.635,2.61 -3.635,2.61 -4.185,2.61
  L1 region: -4.185,2.39 -3.635,2.39 -3.581,2.379 -3.536,2.349 -3.506,2.304 -3.495,2.25 -3.495,2.25 -3.506,2.196 -3.536,2.151 -3.581,2.121 -3.635,2.11 -3.635,2.11 -4.185,2.11
  L1 region: -4.185,1.39 -3.635,1.39 -3.581,1.379 -3.536,1.349 -3.506,1.304 -3.495,1.25 -3.495,1.25 -3.506,1.196 -3.536,1.151 -3.581,1.121 -3.635,1.11 -3.635,1.11 -4.185,1.11
  L1 region: -4.185,0.89 -3.635,0.89 -3.581,0.879 -3.536,0.849 -3.506,0.804 -3.495,0.75 -3.495,0.75 -3.506,0.696 -3.536,0.651 -3.581,0.621 -3.635,0.61 -3.635,0.61 -4.185,0.61
  L1 region: -4.185,0.39 -3.635,0.39 -3.581,0.379 -3.536,0.349 -3.506,0.304 -3.495,0.25 -3.495,0.25 -3.506,0.196 -3.536,0.151 -3.581,0.121 -3.635,0.11 -3.635,0.11 -4.185,0.11
  L1 region: -4.185,-3.11 -3.635,-3.11 -3.581,-3.121 -3.536,-3.151 -3.506,-3.196 -3.495,-3.25 -3.495,-3.25 -3.506,-3.304 -3.536,-3.349 -3.581,-3.379 -3.635,-3.39 -3.635,-3.39 -4.185,-3.39
  L1 region: 4.185,-3.39 3.635,-3.39 3.581,-3.379 3.536,-3.349 3.506,-3.304 3.495,-3.25 3.495,-3.25 3.506,-3.196 3.536,-3.151 3.581,-3.121 3.635,-3.11 3.635,-3.11 4.185,-3.11
  L1 region: 4.185,-2.89 3.635,-2.89 3.581,-2.879 3.536,-2.849 3.506,-2.804 3.495,-2.75 3.495,-2.75 3.506,-2.696 3.536,-2.651 3.581,-2.621 3.635,-2.61 3.635,-2.61 4.185,-2.61
  L1 region: 4.185,-2.39 3.635,-2.39 3.581,-2.379 3.536,-2.349 3.506,-2.304 3.495,-2.25 3.495,-2.25 3.506,-2.196 3.536,-2.151 3.581,-2.121 3.635,-2.11 3.635,-2.11 4.185,-2.11
  L1 region: 4.185,-1.89 3.635,-1.89 3.581,-1.879 3.536,-1.849 3.506,-1.804 3.495,-1.75 3.495,-1.75 3.506,-1.696 3.536,-1.651 3.581,-1.621 3.635,-1.61 3.635,-1.61 4.185,-1.61
  silkscreen extent -4.8,-4.08 4.08,4.08, body extent -4.29,-4.29 4.29,4.29, height 0.25
FP-CP-32-31-MFG [mm]
  rect 0.805x0.3 smd paste+0 mask+0: 1(-2.403,1.75) 2(-2.403,1.25) 3(-2.403,0.75) 4(-2.402,0.25) 5(-2.402,-0.25) 6(-2.403,-0.75) 7(-2.403,-1.25) 8(-2.403,-1.75) 17(2.403,-1.75) 18(2.403,-1.25) 19(2.403,-0.75) 20(2.402,-0.25) 21(2.402,0.25) 22(2.403,0.75) 23(2.403,1.25) 24(2.403,1.75)
  rect 0.3x0.805 smd paste+0 mask+0: 9(-1.75,-2.403) 10(-1.25,-2.403) 11(-0.75,-2.403) 12(-0.25,-2.402) 13(0.25,-2.402) 14(0.75,-2.403) 15(1.25,-2.403) 16(1.75,-2.403) 25(1.75,2.403) 26(1.25,2.403) 27(0.75,2.403) 28(0.25,2.402) 29(-0.25,2.402) 30(-0.75,2.403) 31(-1.25,2.403) 32(-1.75,2.403)
  rect 2.8x2.8 smd paste+0 mask+0: 33(0,0)
  Keep-Out Layer region: -1.4,-1.875 0.97,-1.875 0.97,-1.625 -1.4,-1.625
  Keep-Out Layer region: -1.4,1.625 1.4,1.625 1.4,1.875 -1.4,1.875
  silkscreen extent -3.57,-2.55 2.55,2.55, body extent -2.91,-2.91 2.91,2.91, height 0.25
FP-CRCW0603-e3-IPC_A [mil]
  rect 44.69x41.82 smd paste+0 mask+0: 1(-32.1,0) 2(32.1,0)
  silkscreen extent -30,-37 30,37, body extent -74,-41 74,41, height 10
FP-RT0402-MFG [mm]
  rect 0.5x0.6 smd paste+0 mask+0: 1(-0.5,0) 2(0.5,0)
  body extent -0.85,-0.4 0.85,0.4, height 0.25
JD-202R18W102KV4E-2_M [mm] "Chip Capacitor, 2-Leads, Body 3.42x1.82mm, IPC Low Density"
  rect 1.6x1.95 smd: 1(-1.5,0) 2(1.5,0)
  silkscreen extent -0.3,-0.87 0.3,0.87, body extent -1.71,-0.91 1.71,0.91, height 1.7
QTB-QBLP595_V [mm] "SMD, 2-Leads, Body 1x0.5mm"
  rrect25% 0.5x0.55 smd: 1(-0.455,0) 2(0.455,0)
  silkscreen extent -0.9,-0.2 -0.9,0.2, body extent -0.5,-0.25 0.5,0.25, height 0.5
Regulator_4PIN [mm] "SOT223, 4-Leads, Body 6.7x3.7mm, Pitch 2.3mm, IPC Medium Density"
  rrect11% 1.75x0.9 smd: 1(-3.125,2.3) 2(-3.125,0) 3(-3.125,-2.3)
  rrect6% 1.75x3.2 smd: 4(3.125,0)
  silkscreen extent -3.25,-3.35 1.95,3.42, body extent -3.5,-3.25 3.5,3.25, height 1.62
RES_0402 [mm]
  rect 0.54x0.6 smd: 1(-0.432,0) 2(0.432,0)
  silkscreen extent -0.97,-0.56 0.97,0.56, body extent -0.5,-0.25 0.5,0.25, height 0.37
RES_0603 [mil]
  rect 41.68x39.85 smd paste+0 mask+0: 1(-34.52,0) 2(34.52,0)
  silkscreen extent -75,-40 75,40, body extent -75,-39 75,40, height 10
RESC0402(1005)_L [mm] "Chip Resistor, Body 1.0x0.5mm, IPC High Density"
  rrect25% 0.5x0.55 smd: 1(-0.45,0) 2(0.45,0)
  silkscreen extent 0,-0.2 0,0.2, body extent -0.5,-0.25 0.5,0.25, height 0.3
RESC1005X40X25LL05T10 [mm] "Chip Resistor, 2-Leads, Body 1.00x0.50mm, IPC High Density"
  rect 0.5x0.45 smd: 1(-0.375,0) 2(0.375,0)
  body extent -0.53,-0.27 0.53,0.28, height 0.4
USBc_16PIN_QFN__footprint [mm]
  rect 0.6x1.15 smd paste+0 mask+0: A1B12(-3.2,3.425) A4B9(-2.4,3.425) B1A12(3.2,3.425) B4A9(2.4,3.425)
  rect 0.3x1.15 smd paste+0 mask+0: A5(-1.25,3.425) A6(-0.25,3.425) A7(0.25,3.425) A8(1.25,3.425) B5(1.75,3.425) B6(0.75,3.425) B7(-0.75,3.425) B8(-1.75,3.425)
  rrect100% 1x1.8 hole 1.4 slot 0.6 at 0 deg paste-2539.97 mask+0: S1(-4.32,2.85) S2(4.32,2.85)
  rrect100% 1x2.2 hole 1.8 slot 0.6 at 0 deg paste-2539.97 mask+0: S3(-4.32,-1.15) S4(4.32,-1.15)
  silkscreen extent -4.57,-3.35 4.57,4.7, body extent -4.92,-3.45 4.92,4.1, height 0.25

## Part data
C1 C5 C6 C13 C14 C15 C26 C29 C31: library part CL05B104KB54PNC, "CAP CER 0.1UF 50V X7R 0402", Capacitor Type=Ceramic, LCSC Part Number=C307331, Manufacturer=Samsung, Supplier Part Number=1276-CL05B104KB54PNCCT-ND, Category="Ceramic Capacitors", ComponentLink1Description=https://datasheet.ciiva.com:443/pdfs/VipMasterIC/IC/SEMS/SEMS-S-A0006318249/SEMS-S-A0006320959-1.pdf?src-supplier=IHS+Markit, ComponentLink1URL=https://datasheet.ciiva.com:443/pdfs/VipMasterIC/IC/SEMS/SEMS-S-A0006318249/SEMS-S-A0006320959-1.pdf?src-supplier=IHS+Markit, ComponentLink2Description=https://datasheet.octopart.com/CL05B104KB54PNC-Samsung-datasheet-8326407.pdf?src-supplier=TME, ComponentLink2URL=https://datasheet.octopart.com/CL05B104KB54PNC-Samsung-datasheet-8326407.pdf?src-supplier=TME, Dielectric Material=Ceramic, Manufacturer Part Number=CL05B104KB54PNC, Pins=2, Pricing="1=0.1, 10=0.044, 50=0.025, 100=0.0194, 500=0.0146, 1000=0.01147, 2500=0.01043, 5000=0.00959 (USD)", Reach SVHC Compliant=Yes, RoHS=Yes, RoHS Compliant=Yes, Stock=1237875, Supplier=Digikey
C2 C3: library part CL05C150JC51PNC, "Multilayer Ceramic Capacitors MLCC - SMD/SMT 0402 C0G 15pF 5% 100V automotive grade", Case/Package=0402, Dielectric Material=Ceramic, Manufacturer="Samsung Electro-Mechanics", Max Operating Temperature=125°C, Min Operating Temperature=-55°C, Temperature Coefficient=30ppm/°C, Tolerance=5%, Voltage Rating=100V, Capacitance=15pF, Category="Ceramic Capacitors", China RoHS=Compliant, ComponentLink1Description=https://datasheet.octopart.com:443/CL05C150JC51PNC-Samsung-Electro-Mechanics-datasheet-176142735.pdf?src-supplier=IHS, ComponentLink1URL=https://datasheet.octopart.com:443/CL05C150JC51PNC-Samsung-Electro-Mechanics-datasheet-176142735.pdf?src-supplier=IHS, Height=500µm, Length=1mm, Lifecycle Status=Production, Manufacturer Part Number=CL05C150JC51PNC, Material=Ceramic, Mount="Surface Mount", Number of Terminals=2, Pricing 1="1=0.1, 10=0.055, 50=0.0378, 100=0.0326, 500=0.02386 (USD)", REACH SVHC=Unaffected, RoHS=Compliant, Stock 1=123361, Supplier 1=DigiKey, Voltage Rating (DC)=100V, Width=500µm
C4 C7 C16 C27 C32 C34 C36 C39: library part CL05B472KB5NNNC, "4700 pF ±10% 50V Ceramic Capacitor X7R 0402 (1005 Metric)", Capacitance=4.7nF, Case Code (Imperial)=0402, Case Code (Metric)=1005, Dielectric=X7R, Dielectric Material=Ceramic, Manufacturer="Samsung Electro-Mechanics", Max Operating Temperature=125°C, Min Operating Temperature=-55°C, Tolerance=10%, Voltage=50V, Case/Package=0402, Category="Ceramic Capacitors", China RoHS=Compliant, ComponentLink1Description=https://datasheet.octopart.com:443/CL05B472KB5NNNC-Samsung-Electro-Mechanics-datasheet-182018856.pdf?src-supplier=IHS, ComponentLink1URL=https://datasheet.octopart.com:443/CL05B472KB5NNNC-Samsung-Electro-Mechanics-datasheet-182018856.pdf?src-supplier=IHS, ComponentLink2Description=https://datasheet.octopart.com:443/CL05B472KB5NNNC-Samsung-Electro-Mechanics-datasheet-137699841.pdf?src-supplier=Samsung+SCT, ComponentLink2URL=https://datasheet.octopart.com:443/CL05B472KB5NNNC-Samsung-Electro-Mechanics-datasheet-137699841.pdf?src-supplier=Samsung+SCT, ComponentLink3Description=https://datasheet.octopart.com:443/CL05B472KB5NNNC-Samsung-Electro-Mechanics-datasheet-116890943.pdf?src-supplier=Future+Electronics, ComponentLink3URL=https://datasheet.octopart.com:443/CL05B472KB5NNNC-Samsung-Electro-Mechanics-datasheet-116890943.pdf?src-supplier=Future+Electronics, ComponentLink4Description=https://datasheet.octopart.com:443/CL05B472KB5NNNC-Samsung-Electro-Mechanics-datasheet-81461654.pdf?src-supplier=Future+Electronics, ComponentLink4URL=https://datasheet.octopart.com:443/CL05B472KB5NNNC-Samsung-Electro-Mechanics-datasheet-81461654.pdf?src-supplier=Future+Electronics, ComponentLink5Description=https://datasheet.octopart.com:443/CL05B472KB5NNNC-Samsung-datasheet-42485177.pdf?src-supplier=Future+Electronics, ComponentLink5URL=https://datasheet.octopart.com:443/CL05B472KB5NNNC-Samsung-datasheet-42485177.pdf?src-supplier=Future+Electronics, ComponentLink6Description=https://datasheet.octopart.com:443/CL05B472KB5NNNC-Samsung-datasheet-26589051.pdf?src-supplier=Future+Electronics, ComponentLink6URL=https://datasheet.octopart.com:443/CL05B472KB5NNNC-Samsung-datasheet-26589051.pdf?src-supplier=Future+Electronics, ComponentLink7Description=https://datasheet.octopart.com:443/CL05B472KB5NNNC-Samsung-datasheet-12537298.pdf?src-supplier=Future+Electronics, ComponentLink7URL=https://datasheet.octopart.com:443/CL05B472KB5NNNC-Samsung-datasheet-12537298.pdf?src-supplier=Future+Electronics, ComponentLink8Description=https://datasheet.octopart.com:443/CL05B472KB5NNNC-Samsung-Electro-Mechanics-datasheet-149154072.pdf?src-supplier=Future+Electronics, ComponentLink8URL=https://datasheet.octopart.com:443/CL05B472KB5NNNC-Samsung-Electro-Mechanics-datasheet-149154072.pdf?src-supplier=Future+Electronics, ComponentLink9Description=https://datasheet.octopart.com/CL05B472KB5NNNC-Samsung-Electro-Mechanics-datasheet-97040617.pdf, ComponentLink9URL=https://datasheet.octopart.com/CL05B472KB5NNNC-Samsung-Electro-Mechanics-datasheet-97040617.pdf, ComponentLink10Description=https://datasheet.octopart.com/CL05B472KB5NNNC-Samsung-Electro-Mechanics-datasheet-8324245.pdf, ComponentLink10URL=https://datasheet.octopart.com/CL05B472KB5NNNC-Samsung-Electro-Mechanics-datasheet-8324245.pdf, ComponentLink11Description=https://datasheet.octopart.com:443/CL05B472KB5NNNC-Samsung-Electro-Mechanics-datasheet-11772878.pdf?src-supplier=Arrow+Electronics, ComponentLink11URL=https://datasheet.octopart.com:443/CL05B472KB5NNNC-Samsung-Electro-Mechanics-datasheet-11772878.pdf?src-supplier=Arrow+Electronics, ComponentLink12Description=https://datasheet.octopart.com:443/CL05B472KB5NNNC-Samsung-datasheet-8326407.pdf?src-supplier=TME, ComponentLink12URL=https://datasheet.octopart.com:443/CL05B472KB5NNNC-Samsung-datasheet-8326407.pdf?src-supplier=TME, Country of Origin="Mainland China, Philippines, South Korea", Depth=500µm, Export Control Classification Number (ECCN) Code=EAR99, Harmonized Tariff Schedule (HTS) Code=8532.24.00.20, Height=550µm, Introduction Date=2010-02-10, Lead Free="Lead Free", Length=1mm, Lifecycle Status=Production, Manufacturer Part Number=CL05B472KB5NNNC, Material=Ceramic, Mount="Surface Mount", Number of Terminals=2, Pricing 1="1=0.1, 10=0.033, 50=0.0224, 100=0.019, 500=0.01354 (USD)", Radiation Hardening=No, REACH SVHC=Unaffected, RoHS=Compliant, Schedule B="8532240020, 8532240020|8532240020, 8532240020|8532240020|8532240020, 8532240020|8532240020|8532240020|8532240020", Stock 1=84266, Supplier 1=DigiKey, Thickness=558.8µm, Voltage Rating=50V, Voltage Rating (DC)=50V, Width=500µm
C8 C9: library part CMP-2000-05161-1, "Chip Capacitor, 1 nF, +/- 10%, 2000 V, -55 to 125 degC, 1206 (3216 Metric), RoHS, Tape and Reel", Capacitance=1000pF, Case Code - in=1206, Case Code - mm=3216, Case Height=1.27mm, Case Length=3.15mm, Case Width=1.6mm, Dielectric=X7R, Manufacturer="Johanson Dielectrics", Maximum Operating Temperature=+125C, Minimum Operating Temperature=-55C, Package / Case=1206(3216metric), Tolerance=10%, Voltage Rating DC=2kV, Brand=JohansonDielectrics, Class=2, Datasheet URL=http://www.farnell.com/datasheets/87135.pdf, Datasheet Version=Apr-07, Factory Pack Quantity=3000, Manufacturer URL=http://www.johansondielectrics.com, Packaging=Reel, Product=GeneralTypeMLCCs, Product Category=MultilayerCeramicCapacitorsMLCC-SMD/SMT, RoHS=Details, Termination Style=SMD/SMT, Type=HighVoltageCapacitors
C10 C11: library part CL05A106MP5NUNC, "CAP CER 10UF 10V X5R 0402", Capacitance=10µF, Case Code (Imperial)=0402, Case Code (Metric)=1005, Dielectric=X5R, Dielectric Material=Ceramic, Manufacturer="Samsung Electro-Mechanics", Max Operating Temperature=85°C, Min Operating Temperature=-55°C, Tolerance=20%, Voltage Rating=10V, Case/Package=0402, Category="Ceramic Capacitors", China RoHS=Compliant, ComponentLink1Description=https://datasheet.octopart.com:443/CL05A106MP5NUNC-Samsung-Electro-Mechanics-datasheet-182018593.pdf?src-supplier=IHS, ComponentLink1URL=https://datasheet.octopart.com:443/CL05A106MP5NUNC-Samsung-Electro-Mechanics-datasheet-182018593.pdf?src-supplier=IHS, ComponentLink2Description=https://datasheet.octopart.com:443/CL05A106MP5NUNC-Samsung-Electro-Mechanics-datasheet-136031723.pdf?src-supplier=Upverter, ComponentLink2URL=https://datasheet.octopart.com:443/CL05A106MP5NUNC-Samsung-Electro-Mechanics-datasheet-136031723.pdf?src-supplier=Upverter, ComponentLink3Description=https://datasheet.octopart.com:443/CL05A106MP5NUNC-Samsung-Electro-Mechanics-datasheet-110226206.pdf?src-supplier=Future+Electronics, ComponentLink3URL=https://datasheet.octopart.com:443/CL05A106MP5NUNC-Samsung-Electro-Mechanics-datasheet-110226206.pdf?src-supplier=Future+Electronics, ComponentLink4Description=https://datasheet.octopart.com:443/CL05A106MP5NUNC-Samsung-Electro-Mechanics-datasheet-87580039.pdf?src-supplier=Future+Electronics, ComponentLink4URL=https://datasheet.octopart.com:443/CL05A106MP5NUNC-Samsung-Electro-Mechanics-datasheet-87580039.pdf?src-supplier=Future+Electronics, ComponentLink5Description=https://datasheet.octopart.com:443/CL05A106MP5NUNC-Samsung-Electro-Mechanics-datasheet-81461595.pdf?src-supplier=Future+Electronics, ComponentLink5URL=https://datasheet.octopart.com:443/CL05A106MP5NUNC-Samsung-Electro-Mechanics-datasheet-81461595.pdf?src-supplier=Future+Electronics, ComponentLink6Description=https://datasheet.octopart.com:443/CL05A106MP5NUNC-Samsung-datasheet-42280527.pdf?src-supplier=Future+Electronics, ComponentLink6URL=https://datasheet.octopart.com:443/CL05A106MP5NUNC-Samsung-datasheet-42280527.pdf?src-supplier=Future+Electronics, ComponentLink7Description=https://datasheet.octopart.com:443/CL05A106MP5NUNC-Samsung-datasheet-34153002.pdf?src-supplier=Future+Electronics, ComponentLink7URL=https://datasheet.octopart.com:443/CL05A106MP5NUNC-Samsung-datasheet-34153002.pdf?src-supplier=Future+Electronics, ComponentLink8Description=https://datasheet.octopart.com:443/CL05A106MP5NUNC-Samsung-datasheet-25077983.pdf?src-supplier=Future+Electronics, ComponentLink8URL=https://datasheet.octopart.com:443/CL05A106MP5NUNC-Samsung-datasheet-25077983.pdf?src-supplier=Future+Electronics, ComponentLink9Description=https://datasheet.octopart.com:443/CL05A106MP5NUNC-Samsung-Electro-Mechanics-datasheet-149136670.pdf?src-supplier=Future+Electronics, ComponentLink9URL=https://datasheet.octopart.com:443/CL05A106MP5NUNC-Samsung-Electro-Mechanics-datasheet-149136670.pdf?src-supplier=Future+Electronics, ComponentLink10Description=https://datasheet.octopart.com:443/CL05A106MP5NUNC-Samsung-datasheet-8326407.pdf?src-supplier=TME, ComponentLink10URL=https://datasheet.octopart.com:443/CL05A106MP5NUNC-Samsung-datasheet-8326407.pdf?src-supplier=TME, Contact Plating=Tin, Depth=500µm, Height=700µm, Lead Free="Lead Free", Length=1mm, Lifecycle Status=NRND, Manufacturer Part Number=CL05A106MP5NUNC, Material=Ceramic, Mount="Surface Mount", Number of Terminals=2, Packaging="Tape and Reel", Pricing 1="1=0.18, 10=0.104, 50=0.0732, 100=0.0638, 500=0.0481 (USD)", Radiation Hardening=No, REACH SVHC=Unaffected, RoHS=Compliant, Schedule B="8532240020, 8532240020|8532240020|8532240020|8532240020|8532240020|8532240020|8532240020|8532240020|8532240020|8532240020|8532240020|8532240020|8532240020|8532240020|8532240020|8532240020|8532240020|8532240020|8532240020|8532240020|8532240020|8532240020|8532240020|85", Stock 1=4, Supplier 1=DigiKey, Termination=Wraparound, Thickness=711.2µm, Voltage Rating (DC)=10V, Width=500µm
C12: library part CL05A475MO5NUNC, "CAP CER 4.7UF 16V X5R 0402", Capacitance=4.7µF, Case Code (Imperial)=0402, Case Code (Metric)=1005, Dielectric=X5R, Dielectric Material=Ceramic, Manufacturer="Samsung Electro-Mechanics", Max Operating Temperature=85°C, Min Operating Temperature=-55°C, Tolerance=20%, Voltage Rating=16V, Case/Package=0402, Category="Ceramic Capacitors", China RoHS=Compliant, ComponentLink1Description=https://datasheet.octopart.com:443/CL05A475MO5NUNC-Samsung-Electro-Mechanics-datasheet-178175196.pdf?src-supplier=Farnell, ComponentLink1URL=https://datasheet.octopart.com:443/CL05A475MO5NUNC-Samsung-Electro-Mechanics-datasheet-178175196.pdf?src-supplier=Farnell, ComponentLink2Description=https://datasheet.octopart.com:443/CL05A475MO5NUNC-Samsung-Electro-Mechanics-datasheet-123102911.pdf?src-supplier=Future+Electronics, ComponentLink2URL=https://datasheet.octopart.com:443/CL05A475MO5NUNC-Samsung-Electro-Mechanics-datasheet-123102911.pdf?src-supplier=Future+Electronics, ComponentLink3Description=https://datasheet.octopart.com:443/CL05A475MO5NUNC-Samsung-Electro-Mechanics-datasheet-110226225.pdf?src-supplier=Future+Electronics, ComponentLink3URL=https://datasheet.octopart.com:443/CL05A475MO5NUNC-Samsung-Electro-Mechanics-datasheet-110226225.pdf?src-supplier=Future+Electronics, ComponentLink4Description=https://datasheet.octopart.com:443/CL05A475MO5NUNC-Samsung-Electro-Mechanics-datasheet-83567908.pdf?src-supplier=Future+Electronics, ComponentLink4URL=https://datasheet.octopart.com:443/CL05A475MO5NUNC-Samsung-Electro-Mechanics-datasheet-83567908.pdf?src-supplier=Future+Electronics, ComponentLink5Description=https://datasheet.octopart.com:443/CL05A475MO5NUNC-Samsung-Electro-Mechanics-datasheet-68297032.pdf?src-supplier=Future+Electronics, ComponentLink5URL=https://datasheet.octopart.com:443/CL05A475MO5NUNC-Samsung-Electro-Mechanics-datasheet-68297032.pdf?src-supplier=Future+Electronics, ComponentLink6Description=https://datasheet.octopart.com:443/CL05A475MO5NUNC-Samsung-Electro-Mechanics-datasheet-87580057.pdf?src-supplier=Future+Electronics, ComponentLink6URL=https://datasheet.octopart.com:443/CL05A475MO5NUNC-Samsung-Electro-Mechanics-datasheet-87580057.pdf?src-supplier=Future+Electronics, ComponentLink7Description=https://datasheet.octopart.com:443/CL05A475MO5NUNC-Samsung-Electro-Mechanics-datasheet-149136694.pdf?src-supplier=Future+Electronics, ComponentLink7URL=https://datasheet.octopart.com:443/CL05A475MO5NUNC-Samsung-Electro-Mechanics-datasheet-149136694.pdf?src-supplier=Future+Electronics, Height=500µm, Length=1mm, Lifecycle Status=Production, Manufacturer Part Number=CL05A475MO5NUNC, Material=Ceramic, Mount="Surface Mount", Number of Terminals=2, Pricing 1="1=0.52, 10=0.316, 50=0.2358, 100=0.211, 500=0.16936 (USD)", REACH SVHC=Unaffected, RoHS=Compliant, Schedule B="8532240020, 8532240020|8532240020, 8532240020|8532240020|8532240020, 8532240020|8532240020|8532240020|8532240020", Stock 1=764058, Supplier 1=DigiKey, Thickness=558.8µm, Voltage Rating (DC)=16V, Width=500µm
C17 C28 C33: library part CL05B152KB5VPNC, "1500 pF ±10% 50V Ceramic Capacitor X7R 0402 (1005 Metric)", Capacitance=1.5nF, Case Code (Imperial)=0402, Case Code (Metric)=1005, Dielectric Material=Ceramic, Manufacturer="Samsung Electro-Mechanics", Max Operating Temperature=125°C, Min Operating Temperature=-55°C, Ratings=AEC-Q200, Tolerance=10%, Voltage Rating=50V, Case/Package=0402, Category="Ceramic Capacitors", China RoHS=Compliant, ComponentLink1Description=https://datasheet.octopart.com:443/CL05B152KB5VPNC-Samsung-Electro-Mechanics-datasheet-176142735.pdf?src-supplier=IHS, ComponentLink1URL=https://datasheet.octopart.com:443/CL05B152KB5VPNC-Samsung-Electro-Mechanics-datasheet-176142735.pdf?src-supplier=IHS, ComponentLink2Description=https://datasheet.octopart.com:443/CL05B152KB5VPNC-Samsung-Electro-Mechanics-datasheet-141346877.pdf?src-supplier=Samsung+SCT, ComponentLink2URL=https://datasheet.octopart.com:443/CL05B152KB5VPNC-Samsung-Electro-Mechanics-datasheet-141346877.pdf?src-supplier=Samsung+SCT, ComponentLink3Description=https://datasheet.octopart.com:443/CL05B152KB5VPNC-Samsung-datasheet-66660282.pdf?src-supplier=Future+Electronics, ComponentLink3URL=https://datasheet.octopart.com:443/CL05B152KB5VPNC-Samsung-datasheet-66660282.pdf?src-supplier=Future+Electronics, ComponentLink4Description=https://datasheet.octopart.com:443/CL05B152KB5VPNC-Samsung-datasheet-62043905.pdf?src-supplier=Future+Electronics, ComponentLink4URL=https://datasheet.octopart.com:443/CL05B152KB5VPNC-Samsung-datasheet-62043905.pdf?src-supplier=Future+Electronics, ComponentLink5Description=https://datasheet.octopart.com:443/CL05B152KB5VPNC-Samsung-Electro-Mechanics-datasheet-68304628.pdf?src-supplier=Future+Electronics, ComponentLink5URL=https://datasheet.octopart.com:443/CL05B152KB5VPNC-Samsung-Electro-Mechanics-datasheet-68304628.pdf?src-supplier=Future+Electronics, ComponentLink6Description=https://datasheet.octopart.com:443/CL05B152KB5VPNC-Samsung-Electro-Mechanics-datasheet-149136721.pdf?src-supplier=Future+Electronics, ComponentLink6URL=https://datasheet.octopart.com:443/CL05B152KB5VPNC-Samsung-Electro-Mechanics-datasheet-149136721.pdf?src-supplier=Future+Electronics, ComponentLink7Description=https://datasheet.octopart.com:443/CL05B152KB5VPNC-Samsung-datasheet-8326407.pdf?src-supplier=TME, ComponentLink7URL=https://datasheet.octopart.com:443/CL05B152KB5VPNC-Samsung-datasheet-8326407.pdf?src-supplier=TME, Features="Soft Termination", Height=550µm, Lead Free="Lead Free", Length=990.6µm, Lifecycle Status=Production, Manufacturer Part Number=CL05B152KB5VPNC, Material=Ceramic, Mount="Surface Mount", Number of Terminals=2, Packaging="Tape & Reel (TR)", Pricing 1="1=0.1, 10=0.036, 50=0.0242, 100=0.0206, 500=0.01472 (USD)", REACH SVHC=Unaffected, RoHS=Compliant, Stock 1=275794, Supplier 1=DigiKey, Thickness=558.8µm, Voltage Rating (DC)=50V, Width=508µm
C18 C19 C22 C24 C35: library part CL05B104KB5NNNC, "Multilayer Ceramic Capacitors MLCC - SMD/SMT 100nF0.150V X7R 1005 0402", Capacitance=100nF, Case/Package=0402, Dielectric=X7R, Dielectric Material=Ceramic, Manufacturer="Samsung Electro-Mechanics", Max Operating Temperature=125°C, Min Operating Temperature=-55°C, Mouser Part Number=187-CL05B104KB5NNNC, Tolerance=10%, Voltage Rating=50V, Category="Ceramic Capacitors", China RoHS=Compliant, ComponentLink1Description=https://datasheet.octopart.com:443/CL05B104KB5NNNC-Samsung-Electro-Mechanics-datasheet-141346860.pdf?src-supplier=IHS, ComponentLink1URL=https://datasheet.octopart.com:443/CL05B104KB5NNNC-Samsung-Electro-Mechanics-datasheet-141346860.pdf?src-supplier=IHS, ComponentLink2Description=https://datasheet.octopart.com/CL05B104KB5NNNC-Samsung-Electro-Mechanics-datasheet-97040617.pdf, ComponentLink2URL=https://datasheet.octopart.com/CL05B104KB5NNNC-Samsung-Electro-Mechanics-datasheet-97040617.pdf, ComponentLink3Description=https://datasheet.octopart.com/General-Multilayer-Ceramic-Capacitors-Samsung-datasheet-family-111.pdf, ComponentLink3URL=https://datasheet.octopart.com/General-Multilayer-Ceramic-Capacitors-Samsung-datasheet-family-111.pdf, ComponentLink4Description=https://datasheet.octopart.com:443/CL05B104KB5NNNC-Samsung-datasheet-8326407.pdf?src-supplier=TME, ComponentLink4URL=https://datasheet.octopart.com:443/CL05B104KB5NNNC-Samsung-datasheet-8326407.pdf?src-supplier=TME, ComponentLink5Description=http://sigma.octopart.com:80/rohs_certificate/General-Multilayer-Ceramic-Capacitors-Samsung-family-110.pdf?src-supplier=Compliance+Statements, ComponentLink5URL=http://sigma.octopart.com:80/rohs_certificate/General-Multilayer-Ceramic-Capacitors-Samsung-family-110.pdf?src-supplier=Compliance+Statements, ComponentLink6Description=http://sigma.octopart.com:80/rohs_statement/General-Multilayer-Ceramic-Capacitors-Samsung-family-132.pdf?src-supplier=Compliance+Statements, ComponentLink6URL=http://sigma.octopart.com:80/rohs_statement/General-Multilayer-Ceramic-Capacitors-Samsung-family-132.pdf?src-supplier=Compliance+Statements, ComponentLink7Description=http://sigma.octopart.com:80/reach_statement/General-Multilayer-Ceramic-Capacitors-Samsung-family-133.pdf?src-supplier=Compliance+Statements, ComponentLink7URL=http://sigma.octopart.com:80/reach_statement/General-Multilayer-Ceramic-Capacitors-Samsung-family-133.pdf?src-supplier=Compliance+Statements, Country of Origin="Mainland China, Philippines, South Korea", Export Control Classification Number (ECCN) Code=EAR99, Harmonized Tariff Schedule (HTS) Code=8532.24.00.20, Height=550µm, Introduction Date=2017-07-04, Lifecycle Status=Production, Manufacturer Part Number=CL05B104KB5NNNC, Material=Ceramic, Mount="Surface Mount", Number of Terminals=2, Pricing 1="1=0.11, 10=0.056, 50=0.0386, 100=0.0332, 500=0.0242 (USD)", REACH SVHC=Unaffected, RoHS=Compliant, Stock 1=1658214, Supplier 1=DigiKey, Voltage Rating (DC)=50V
C20 C21 C23 C25: library part CMP-001-00069-3, "Chip Capacitor, 10nF +/-20%, 50V, 0402, Thickness 0.6 mm", Case/Package=0402, Max Operating Temperature=85°C, Min Operating Temperature=-55°C, Tolerance=5%, Voltage Rating=50V, Mounting Technology=SMT, Pins=2
C30: library part CMP-001-00063-3, "Chip Capacitor, 1µF +/-20%, 10V, 0402, Thickness 0.6 mm", Case/Package=0402, Max Operating Temperature=85°C, Min Operating Temperature=-55°C, Tolerance=10%, Voltage Rating=10V, Mounting Technology=SMT, Pins=2
C37 C38: library part CMP-001-00072-4, "Chip Capacitor, 12pF +/-10%, 50V, 0402, Thickness 0.33 mm", Case/Package=0402, Max Operating Temperature=85°C, Min Operating Temperature=-55°C, Tolerance=20%, Voltage Rating=50V, Mounting Technology=SMT, Pins=2
D1 D3 D4 D5 D7: library part AQ3045-01ETG, "TVS DIODE 5.3VWM 12VC SOD882", LCSC Part Number=C3710326, Manufacturer=Littelfuse, Max Breakdown Voltage=9V, Max Operating Temperature=150°C, Min Breakdown Voltage=6.8V, Min Operating Temperature=-55°C, Non-rep Peak Rev Power Dis-Max=40W, Package Body Material=Plastic, Package Shape=Rectangular, Package Style="CHIP CARRIERMeter", Rep Pk Reverse Voltage-Max=5.3V, Supplier Part Number=F9321CT-ND, Category="TVS Diodes", ComponentLink1Description=https://datasheet.ciiva.com:443/pdfs/VipMasterIC/IC/LFSI/LFSI-S-A0007892042/LFSI-S-A0007892042-1.pdf?src-supplier=IHS+Markit, ComponentLink1URL=https://datasheet.ciiva.com:443/pdfs/VipMasterIC/IC/LFSI/LFSI-S-A0007892042/LFSI-S-A0007892042-1.pdf?src-supplier=IHS+Markit, ComponentLink2Description=https://www.littelfuse.com/~/media/electronics/datasheets/tvs_diode_arrays/littelfuse_tvs_diode_array_aq3045_datasheet.pdf.pdf?src-supplier=Digikey, ComponentLink2URL=https://www.littelfuse.com/~/media/electronics/datasheets/tvs_diode_arrays/littelfuse_tvs_diode_array_aq3045_datasheet.pdf.pdf?src-supplier=Digikey, ComponentLink3Description=http://www.littelfuse.com/~/media/electronics/datasheets/tvs_diode_arrays/littelfuse_tvs_diode_array_aq3045_datasheet.pdf.pdf?src-supplier=Digikey, ComponentLink3URL=http://www.littelfuse.com/~/media/electronics/datasheets/tvs_diode_arrays/littelfuse_tvs_diode_array_aq3045_datasheet.pdf.pdf?src-supplier=Digikey, Diode Element Material=SILICON, Diode Type="TRANS VOLTAGE SUPPRESSOR", Manufacturer Part Number=AQ3045-01ETG, Number of Elements=1, Pins=2, Polarity=Bidirectional, Pricing="1=0.5, 10=0.391, 100=0.2344, 500=0.217, 1000=0.14756, 2000=0.13585, 5000=0.1302 (USD)", Reach SVHC Compliant=Yes, Reference Standard=AEC-Q101, RoHS=Yes, RoHS Compliant=Yes, Stock=21664, Supplier=Digikey, Surface Mount=Yes, Technology=AVALANCHE, Terminal Form="No Lead", Terminal Position=BOTTOM